# Altium PCB EST_MainV20.PcbDoc (part 1 of 7)
Units mil, origin at the board's own origin, x right, y up, seen from the top; angles counter-clockwise.
Board outline 2745 x 4540 mil, 2 copper layers (Top Layer, Bottom Layer); 326 components, 241 nets, 1052 pads, 399 vias.
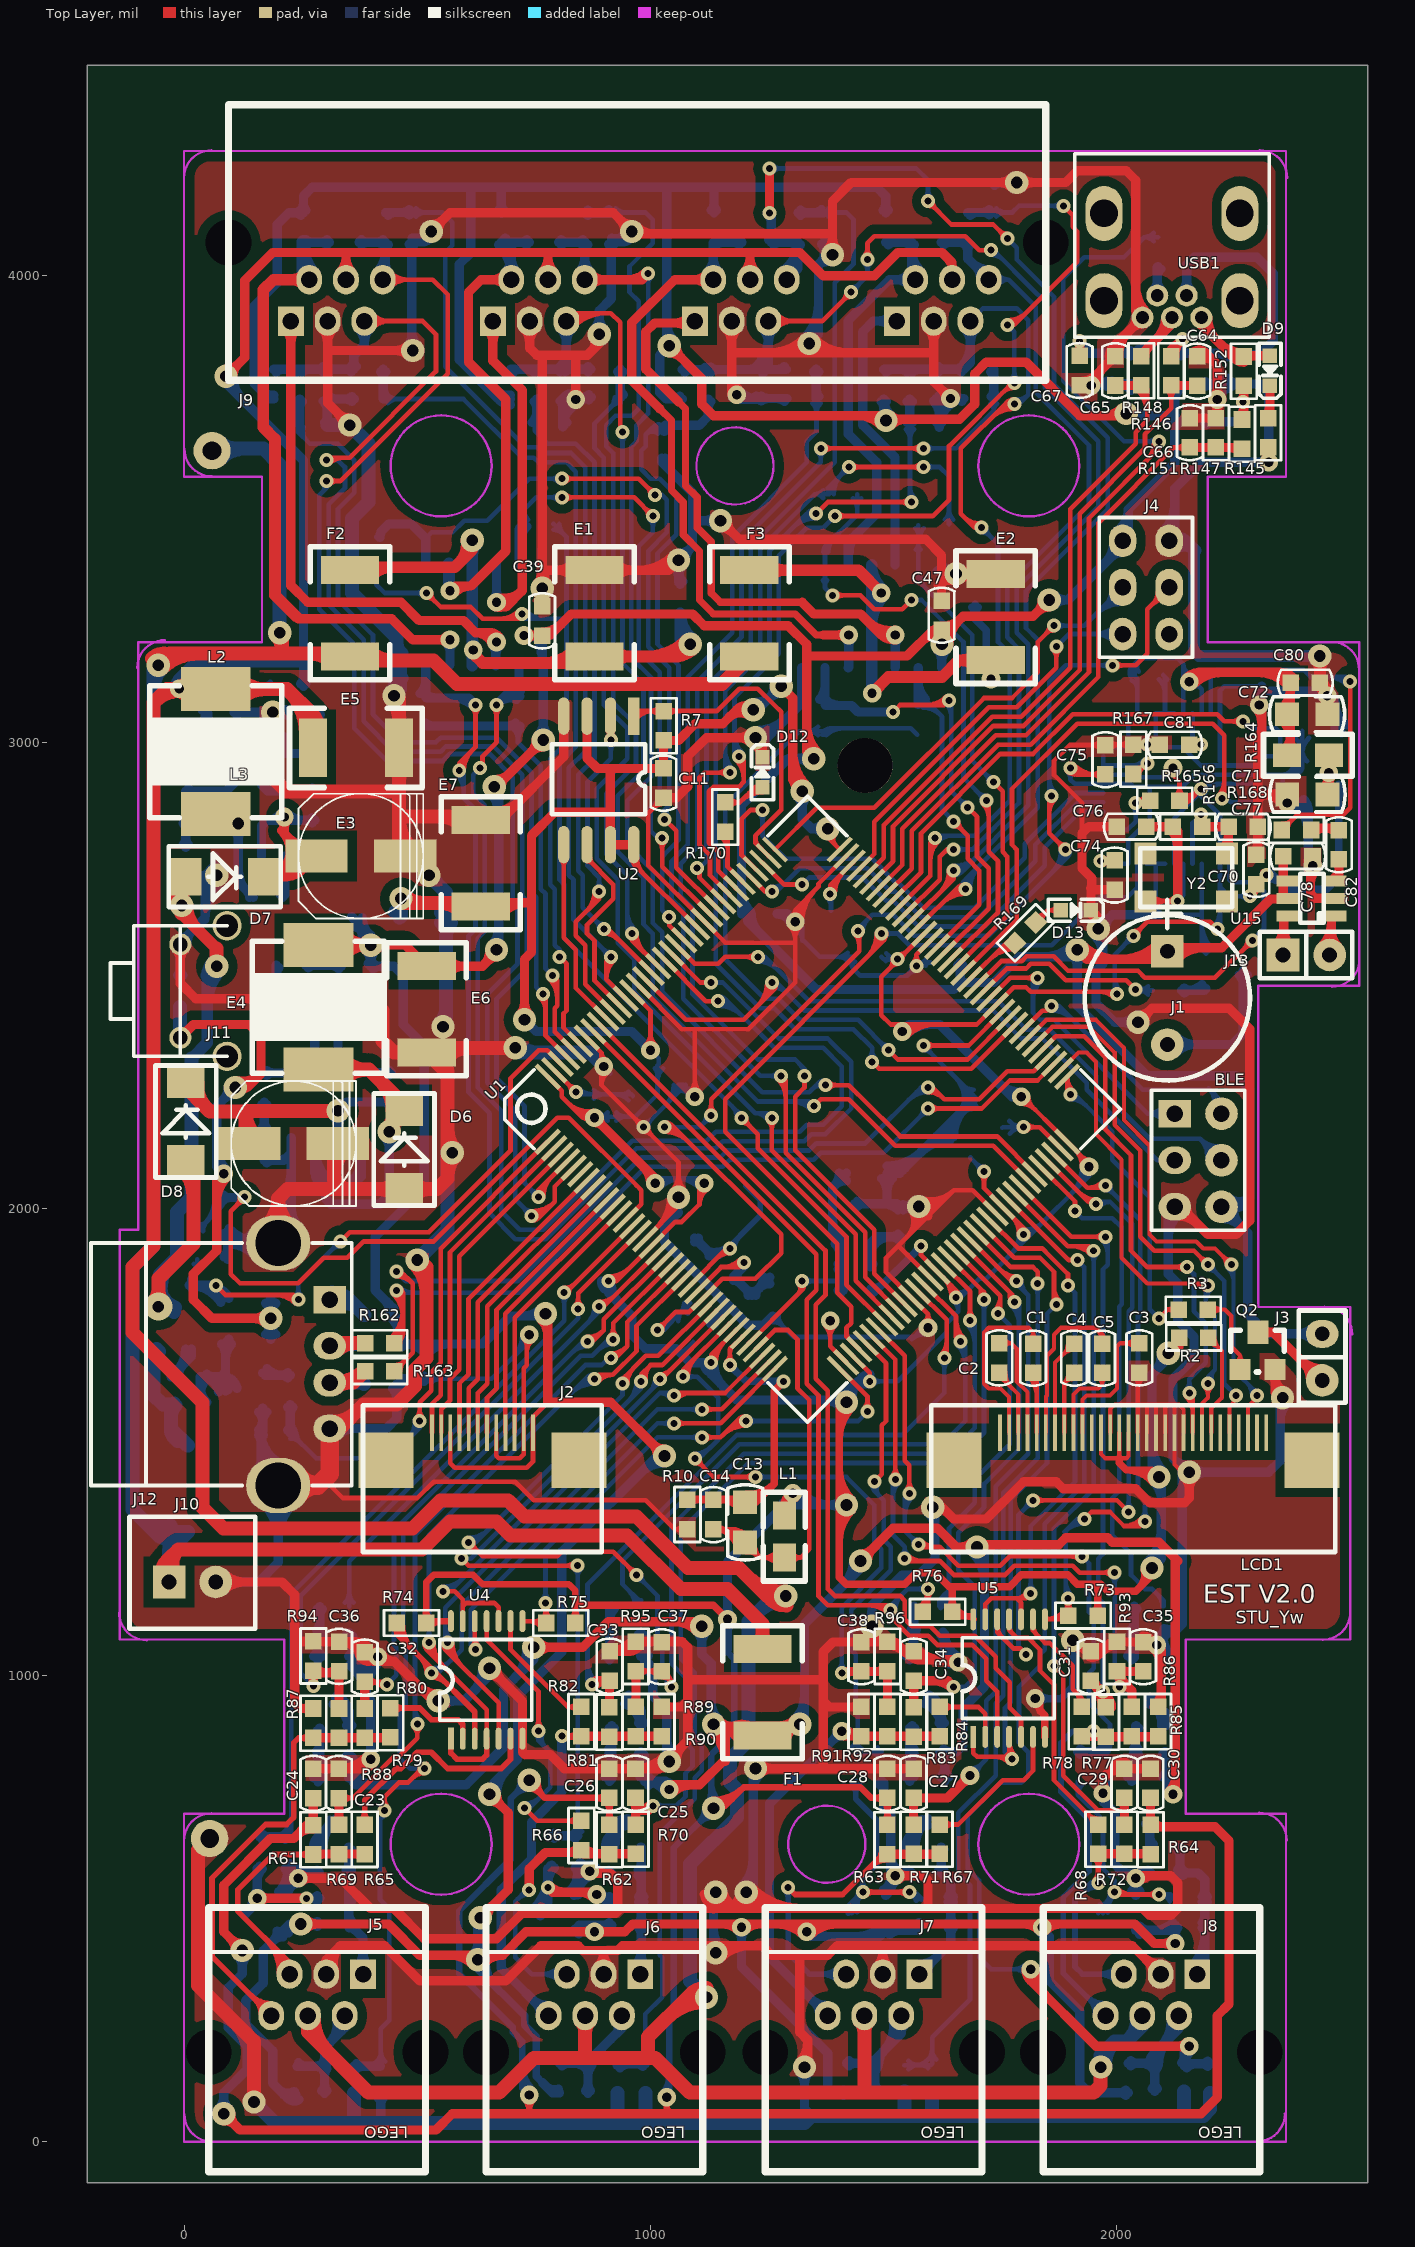
[diagram p0: Top Layer view]
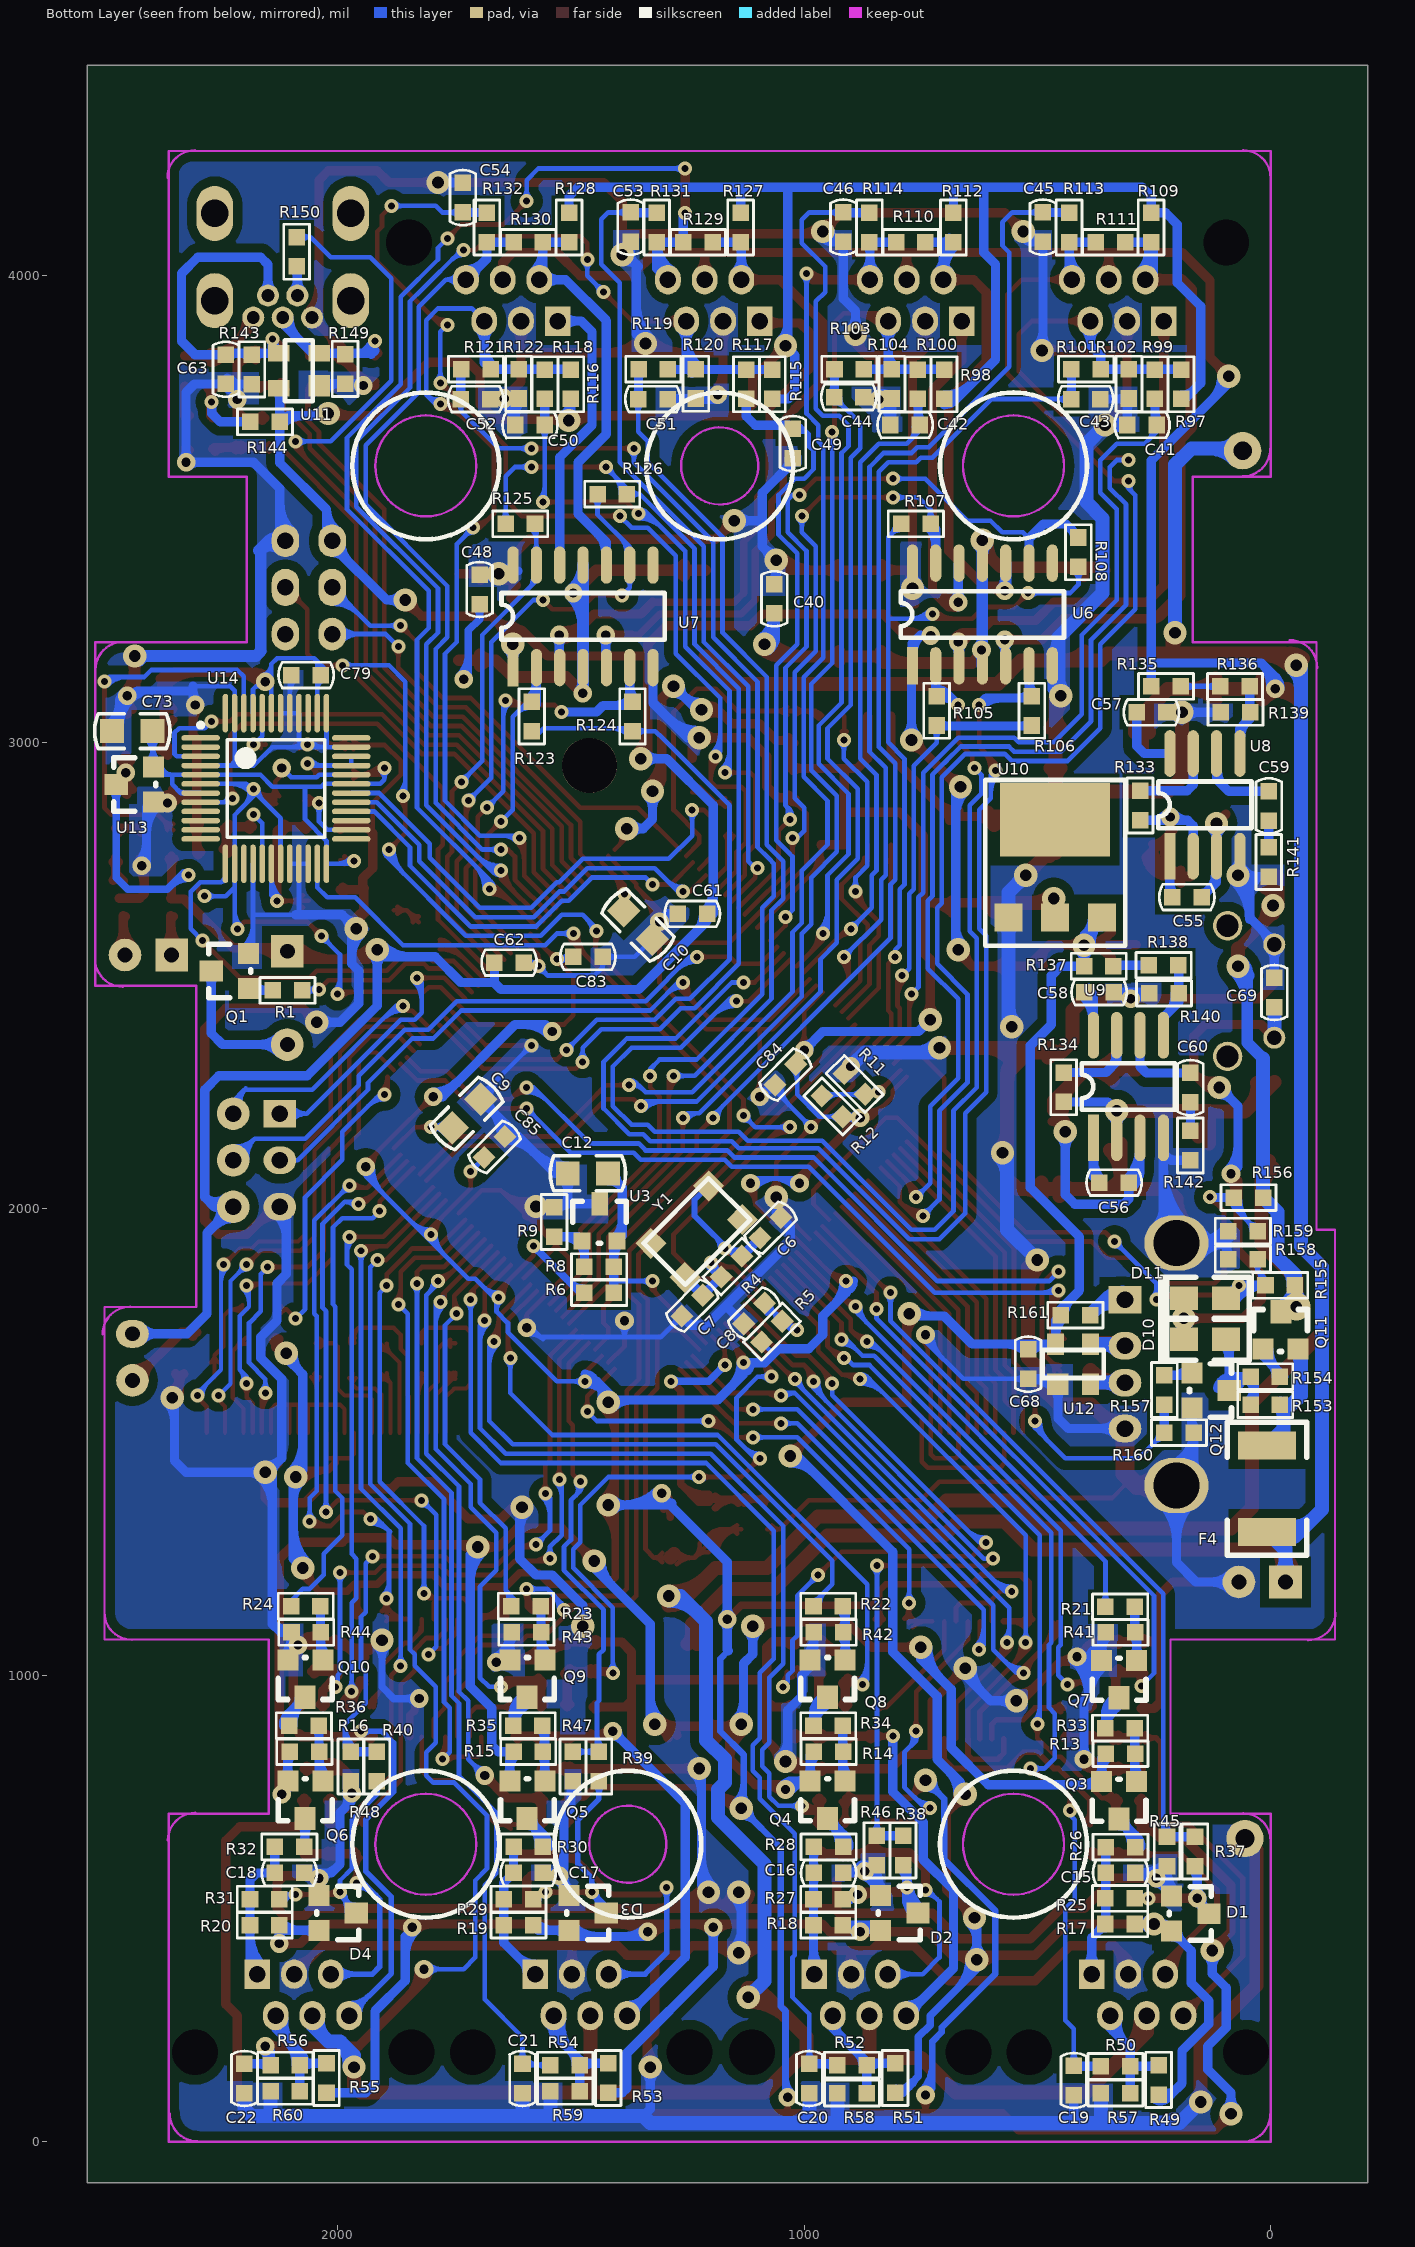
[diagram p1: Bottom Layer view, seen from below]

## Layer stack, top to bottom
Top Layer: signal copper 1.4
Dielectric: prepreg 12.6, FR-4, Dk 4.8
Bottom Layer: signal copper 1.4

## Board outline
-207.8,4451.72 2537.2,4451.72 2537.2,-88.28 -207.8,-88.28

## Design rules (kind name [scope] priority, off if disabled: settings)
Clearance Clearance_1 [All] p1 off: gap=20
Clearance [All] p2: gap=6
ComponentClearance [All] p1 off: gap=10 collisioncheckmode=3 verticalgap=10 showdistances=FALSE
HoleSize [All] p1: absolutevalues=TRUE maxlimit=150 minlimit=1 maxpercent=80.000 minpercent=20.000
HoleToHoleClearance [All] p1 off: gap=10 allowstackedmicrovias=TRUE
MinimumSolderMaskSliver [All] p1 off: minsoldermaskwidth=10
PlaneConnect [All] p1: planeconnectstyle=Direct reliefexpansion=20 reliefentries=4 reliefconductorwidth=10 reliefairgap=10
PolygonConnect [All] p1: connectstyle=Direct reliefconductorwidth=10 reliefentries=4 polygonreliefangle="90 Angle"
RoutingVias [All] p1: holewidth=11.81 width=16.54 viastyle="Through Hole" minholewidth=11.81 minwidth=16.54 maxholewidth=60 maxwidth=150
SilkToSilkClearance [All] p1 off: silktosilkclearance=10
SilkscreenOverComponentPads [All] p1: minsilkscreentomaskgap=10
SolderMaskExpansion [All] p1: expansion=4
TestPointUsage [All] p1: valid=0 allowmultiple=FALSE
Testpoint [All] p1: side=15 testpointundercomponent=TRUE minsize=40 maxsize=100 preferedsize=60 minholesize=0 maxholesize=40 preferedholesize=32 testpointgrid=1 style=1023 order=0123456789
Width [All] p1: maxlimit=100 minlimit=7.87 preferedwidth=7.87 toplayer_prefwidth=19.68 minimp=50.000000 maximp=50.000000 favimp=50.000000
17 further rules are at their usual default settings.

## Classes and differential pairs
component class Designator4: C55 C56 C57 C58 C59 C60 C61 C62 C63 C64 C65 C66 C67 C68 C69 D6 D7 D8 D9 D10 D11 E3 E4 E5 E6 E7 F4 J10 J11 J12 L2 L3 Q11 Q12 R133 R134 R135 R136 R137 R138 R139 R140 R141 R142 R143 R144 R145 R146 R147 R148 R149 R150 R151 R152 R153 R154 R155 R156 R157 R158 R159 R160 R161 R162 R163 U8 U9 U10 U11 U12 USB1
component class EST_MainV20: BLE C1 C2 C3 C4 C5 C6 C7 C8 C9 C10 C11 C12 C13 C14 C83 C84 C85 D12 D13 J1 J2 J3 J4 L1 LCD1 Q1 Q2 R1 R2 R3 R4 R5 R6 R7 R8 R9 R10 R11 R12 R169 R170 U1 U2 U3 Y1
component class Designator3: C70 C71 C72 C73 C74 C75 C76 C77 C78 C79 C80 C81 C82 J13 R164 R165 R166 R167 R168 U13 U14 U15 Y2
component class Designator2: C39 C40 C41 C42 C43 C44 C45 C46 C47 C48 C49 C50 C51 C52 C53 C54 E1 E2 F2 F3 J9 R97 R98 R99 R100 R101 R102 R103 R104 R105 R106 R107 R108 R109 R110 R111 R112 R113 R114 R115 R116 R117 R118 R119 R120 R121 R122 R123 R124 R125 R126 R127 R128 R129 R130 R131 R132 U6 U7
component class Designator1: C15 C16 C17 C18 C19 C20 C21 C22 C23 C24 C25 C26 C27 C28 C29 C30 C31 C32 C33 C34 C35 C36 C37 C38 D1 D2 D3 D4 F1 J5 J6 J7 J8 Q3 Q4 Q5 Q6 Q7 Q8 Q9 Q10 R13 R14 R15 R16 R17 R18 R19 R20 R21 R22 R23 R24 R25 R26 R27 R28 R29 R30 R31 R32 R33 R34 R35 R36 R37 R38 R39 R40 R41 R42 R43 R44 R45 R46 R47 R48 R49 R50 R51 R52 R53 R54 R55 R56 R57 R58 R59 R60 R61 R62 R63 R64 R65 R66 R67 R68 R69 R70 R71 R72 R73 R74 R75 R76 R77 R78 R79 R80 R81 R82 R83 R84 R85 R86 R87 R88 R89 R90 R91 R92 R93 R94 R95 R96 U4 U5

## Components (designator, comment, footprint, x,y, rotation, side; value= is the part's Value field where it differs from the comment)
BLE "CON6" HDR2X3#1 2124,2204 r270 top
C1 "105" CAP_0603 1820,1680 r270 top
C2 "105" CAP_0603 1748,1680 r90 top
C3 "105" CAP_0603 1968,1680 r270 top
C4 "105" CAP_0603 1908,1680 r270 top
C5 "105" CAP_0603 2048,1680 r90 top
C6 "20pF" CAP_0603 1072,1960 r315 bottom
C7 "20pF" CAP_0603 1240,1792 r135 bottom
C8 "104" CAP_0603 1107.26,1775.33 r135 bottom
C9 "20pF" CAP_0805 1724,2204 r135 bottom
C10 "20pF" CAP_0805 1356,2608 r45 bottom
C11 "104" CAP_0603 1028,2912 r90 top
C12 "20pF" CAP_0805 1464,2076 r180 bottom
C13 "20pF" CAP_0805 1203,1328 r270 top
C14 "104" CAP_0603 1135,1344 r90 top
C15 "330pF" CAP_0603 322.2,576.72 r180 bottom
C16 "330pF" CAP_0603 948,576 r180 bottom
C17 "330pF" CAP_0603 1592,576 r180 bottom
C18 "330pF" CAP_0603 2104,576 r180 bottom
C19 "CAP" CAP_0603 422.2,131.72 r270 bottom
C20 "CAP" CAP_0603 989,136 r270 bottom
C21 "CAP" CAP_0603 1604,136 r270 bottom
C22 "CAP" CAP_0603 2200,136 r270 bottom
C23 "10pF" CAP_0603 332.19,767.72 r90 top
C24 "104" CAP_0603 277.19,767.72 r90 top
C25 "10pF" CAP_0603 968,768 r90 top
C26 "104" CAP_0603 912,768 r90 top
C27 "10pF" CAP_0603 1564,768 r90 top
C28 "104" CAP_0603 1508,768 r90 top
C29 "10pF" CAP_0603 2016,768 r90 top
C30 "104" CAP_0603 2072,768 r90 top
C31 "10pF" CAP_0603 1944,1020 r270 top
C32 "10pF" CAP_0603 387.19,1017.72 r270 top
C33 "10pF" CAP_0603 912,1020 r270 top
C34 "10pF" CAP_0603 1564,1020 r270 top
C35 "10pF" CAP_0603 2056,1040 r270 top
C36 "10pF" CAP_0603 332.2,1040.72 r270 top
C37 "10pF" CAP_0603 1024,1040 r270 top
C38 "10pF" CAP_0603 1452,1040 r270 top
C39 "CAP" CAP_0603 768,3260 r90 top
C40 "CAP" CAP_0603 1064,3308 r270 bottom
C41 "100pF" CAP_0603 276,3680 r180 bottom
C42 "CAP" CAP_0603 784,3680 r180 bottom
C43 "47pF" CAP_0603 396,3736 r0 bottom
C44 "CAP" CAP_0603 904,3740 r0 bottom
C45 "100pF" CAP_0603 488,4104 r90 bottom
C46 "CAP" CAP_0603 916,4104 r90 bottom
C47 "CAP" CAP_0603 1624,3272 r90 top
C48 "CAP" CAP_0603 1696,3328 r270 bottom
C49 "100pF" CAP_0603 1024,3640 r90 bottom
C50 "CAP" CAP_0603 1588,3680 r180 bottom
C51 "47pF" CAP_0603 1324,3736 r0 bottom
C52 "CAP" CAP_0603 1704,3736 r0 bottom
C53 "100pF" CAP_0603 1372,4104 r90 bottom
C54 "CAP" CAP_0603 1732,4168 r270 bottom
C55 "104" CAP_0603 180,2668 r180 bottom
C56 "104" CAP_0603 336,2056 r180 bottom
C57 "471" CAP_0603 256,3064 r180 bottom
C58 "471" CAP_0603 368,2464 r180 bottom
C59 "3.9nF" CAP_0603 4,2864 r270 bottom
C60 "3.9nF" CAP_0603 172,2260 r270 bottom
C61 "104" CAP_0603 1240,2632 r180 bottom
C62 "104" CAP_0603 1632,2528 r0 bottom
C63 "15P" CAP_0603 2240,3800 r270 bottom
C64 "15P" CAP_0603 2172,3796 r270 top
C65 "15P" CAP_0603 1996,3796 r90 top
C66 "104" CAP_0603 2156,3664 r270 top
C67 "15P" CAP_0603 1920,3796.73 r90 top
C68 "10uF" CAP_0603 520,1667.27 r270 bottom
C69 "104" CAP_0603 -8,2464 r270 bottom
C70 "104" CAP_0603 2299,2727 r90 top
C71 "10uF" CAP_0805 2408,2888 r0 top
C72 "10uF" CAP_0805 2408,3060 r180 top
C73 "10uF" CAP_0805 2440,3024 r0 bottom
C74 "104" CAP_0603 1995,2715 r90 top
C75 "104" CAP_0603 1975,2963 r270 top
C76 "20pF" CAP_0603 2031,2819 r0 top
C77 "20pF" CAP_0603 2271,2819 r180 top
C78 "104" CAP_0603 2388,2756 r180 top
C79 "104" CAP_0603 2068,3144 r180 bottom
C80 "104" CAP_0603 2404,3128 r180 top
C81 "105" CAP_0603 2123,2995 r0 top
C82 "104" CAP_0603 2476,2780 r90 top
C83 "104" CAP_0603 1464,2540 r180 bottom
C84 "104" CAP_0603 1040,2288 r315 bottom
C85 "104" CAP_0603 1664,2132 r135 bottom
D1 "BAT54S" BAT54S 132.2,546.72 r270 bottom
D2 "BAT54S" BAT54S 756,548 r270 bottom
D3 "BAT54S" BAT54S 1424,548 r270 bottom
D4 "BAT54S" BAT54S 1960,548 r270 bottom
D6 "1N5819" 1N4007SMD 472,2052 r90 top
D7 "1N4007" 1N4007SMD 12,2712 r0 top
D8 "1N4007" 1N4007SMD 4,2112 r90 top
D9 "LED" LED-0603 2328,3796 r270 top
D10 "1N4007" LED-0805 96,1720 r0 bottom
D11 "1N4007" LED-0805 96,1808 r0 bottom
D12 "LED" LED-0603 1240,2936 r90 top
D13 "LED" LED-0603 1912,2640 r0 top
E1 "CAP" 1812 880,3184 r90 top
E2 "CAP" 1812 1740,3176 r90 top
E3 "220uF" KLF_CD0.254 284,2756 r0 top
E4 "220uF" KLF_CD0.254 140,2140 r0 top
E5 "220uF" 1812 276,2988 r0 top
E6 "220uF" 1812 520,2520 r270 top
E7 "220uF" 1812 636,2648 r90 top
F1 "FUSE" 1812 1240,1056 r270 top
F2 "FUSE" 1812 356,3184 r90 top
F3 "FUSE" 1812 1212,3184 r90 top
F4 "FUSE" 1812 8,1492 r270 bottom
J1 "CON2" BUZZER200 2108,2452 r270 top
J2 "KEY_CON" FPC0.5-12 748,1520 r0 top
J3 "CON2" SIP2#1 2440,1732 r0 top
J4 "Header 3X2" HDR2X3#2 2012,3432 r270 top
J5 "CON6" Lego_RJ11 285.27,206.72 r180 top locked (schematic designator PSA1)
J6 "CON6" Lego_RJ11 879.76,206.72 r180 top locked (schematic designator PSB1)
J7 "CON6" Lego_RJ11 1478.19,206.72 r180 top locked (schematic designator PSC1)
J8 "CON6" Lego_RJ11 2073.86,206.72 r180 top locked (schematic designator PSD1)
J9 "CON24" RJ11-4 732.2,4106.72 r0 top locked (schematic designator PMotor)
J10 "CON2" SIP2CON -32,1200 r0 top
J11 "CON2" ButtomSM -7.8,2466.72 r90 top locked (schematic designator S1)
J12 "CON6" USB-A 312.2,1666.72 r270 top locked (schematic designator J1)
J13 "CON2" SIP2#2 2356,2544 r90 top
L1 "10UH" 0805 1287,1252 r90 top
L2 "220uH" L_7x7 68,2980 r90 top
L3 "10uH" L_7x7 288,2432 r90 top
LCD1 "UC1638-180*128" FPC0.5-30 2320,1520 r0 top
Q1 "SS8050" 8050SMD 2276,2452 r90 bottom
Q2 "SS8050" 8050SMD 2244,1740 r0 top
Q3 "PNP" 8050SMD 267.2,686.72 r0 bottom
Q4 "PNP" 8050SMD 892,688 r0 bottom
Q5 "PNP" 8050SMD 1536,688 r0 bottom
Q6 "PNP" 8050SMD 2012,688 r0 bottom
Q7 "NPN" 8050SMD 267.2,946.72 r0 bottom
Q8 "NPN" 8050SMD 892,948 r0 bottom
Q9 "NPN" 8050SMD 1536,948 r0 bottom
Q10 "NPN" 8050SMD 2012,948 r0 bottom
Q11 "IRF530" 8050SMD 36,1784 r180 bottom
Q12 "NPN" 8050SMD 84,1668 r270 bottom
R1 "1K" RES_0603 2108,2468 r180 bottom
R2 "10K" RES_0603 2164,1724 r0 top
R3 "1K" RES_0603 2164,1784 r180 top
R4 "4.7M" RES_0603 1156,1876 r135 bottom
R5 "10K" RES_0603 1068.77,1736.83 r315 bottom
R6 "1K" RES_0603 1440,1820 r180 bottom
R7 "10K" RES_0603 1028,3036 r270 top
R8 "10K" RES_0603 1440,1876 r180 bottom
R9 "10K" RES_0603 1536,1972 r270 bottom
R10 "10K" RES_0603 1079,1344 r90 top
R11 "10K" RES_0603 892,2268 r225 bottom
R12 "10K" RES_0603 940,2220 r225 bottom
R13 "6.8K" RES_0603 322.2,831.72 r180 bottom
R14 "6.8K" RES_0603 948,836 r180 bottom
R15 "6.8K" RES_0603 1592,836 r180 bottom
R16 "6.8K" RES_0603 2072,836 r180 bottom
R17 "10K" RES_0603 322.2,466.72 r0 bottom
R18 "10K" RES_0603 948,464 r0 bottom
R19 "10K" RES_0603 1612,464 r0 bottom
R20 "10K" RES_0603 2156,464 r0 bottom
R21 "2.2K" RES_0603 322.2,1146.72 r0 bottom
R22 "2.2K" RES_0603 948,1148 r0 bottom
R23 "2.2K" RES_0603 1596,1148 r0 bottom
R24 "2.2K" RES_0603 2068,1148 r0 bottom
R25 "1K" RES_0603 322.2,521.72 r0 bottom
R26 "330" RES_0603 322.2,631.72 r180 bottom
R27 "1K" RES_0603 948,520 r0 bottom
R28 "330" RES_0603 948,632 r180 bottom
R29 "1K" RES_0603 1612,520 r0 bottom
R30 "330" RES_0603 1592,632 r180 bottom
R31 "1K" RES_0603 2156,520 r0 bottom
R32 "330" RES_0603 2104,632 r180 bottom
R33 "6.8K" RES_0603 322.2,886.72 r0 bottom
R34 "6.8K" RES_0603 948,892 r0 bottom
R35 "6.8K" RES_0603 1592,892 r0 bottom
R36 "6.8K" RES_0603 2072,892 r0 bottom
R37 "1K" RES_0603 162.2,621.72 r90 bottom
R38 "1K" RES_0603 788,624 r90 bottom
R39 "1K" RES_0603 1440,804 r90 bottom
R40 "1K" RES_0603 1916,804 r90 bottom
R41 "2.2K" RES_0603 322.2,1091.72 r180 bottom
R42 "2.2K" RES_0603 948,1092 r180 bottom
R43 "2.2K" RES_0603 1596,1092 r180 bottom
R44 "2.2K" RES_0603 2068,1092 r180 bottom
R45 "2K" RES_0603 222.2,621.72 r90 bottom
R46 "2K" RES_0603 844,624 r90 bottom
R47 "2K" RES_0603 1496,804 r90 bottom
R48 "2K" RES_0603 1972,804 r90 bottom
R49 "10K" RES_0603 240,132 r90 bottom
R50 "10K" RES_0603 332.2,161.72 r0 bottom
R51 "10K" RES_0603 805,136 r90 bottom
R52 "10K" RES_0603 897,164 r0 bottom
R53 "10K" RES_0603 1420,136 r90 bottom
R54 "10K" RES_0603 1512,164 r0 bottom
R55 "10K" RES_0603 2024,136 r90 bottom
R56 "10K" RES_0603 2112,164 r0 bottom
R57 "10K" RES_0603 332,104 r0 bottom
R58 "10K" RES_0603 897,104 r0 bottom
R59 "10K" RES_0603 1512,108 r0 bottom
R60 "10K" RES_0603 2112,108 r0 bottom
R61 "100K" RES_0603 277.19,647.72 r270 top
R62 "100K" RES_0603 912,648 r270 top
R63 "100K" RES_0603 1508,648 r270 top
R64 "100K" RES_0603 2072,648 r270 top
R65 "220" RES_0603 387.19,647.72 r90 top
R66 "220" RES_0603 852,656 r90 top
R67 "220" RES_0603 1620,648 r90 top
R68 "220" RES_0603 1960,648 r90 top
R69 "4.7K" RES_0603 332.19,647.72 r90 top
R70 "4.7K" RES_0603 968,648 r90 top
R71 "4.7K" RES_0603 1564,648 r90 top
R72 "4.7K" RES_0603 2016,648 r90 top
R73 "4.7K" RES_0603 1928,1128 r180 top
R74 "4.7K" RES_0603 488,1112 r180 top
R75 "4.7K" RES_0603 808,1112 r180 top
R76 "4.7K" RES_0603 1616,1136 r180 top
R77 "4.7K" RES_0603 1976,900 r270 top
R78 "220" RES_0603 1924,900 r90 top
R79 "4.7K" RES_0603 387.19,897.72 r270 top
R80 "220" RES_0603 442.19,897.72 r90 top
R81 "4.7K" RES_0603 912,900 r270 top
R82 "220" RES_0603 852,900 r90 top
R83 "4.7K" RES_0603 1564,900 r270 top
R84 "220" RES_0603 1620,900 r90 top
R85 "220K" RES_0603 2088,900 r90 top
R86 "4.7K" RES_0603 2032,900 r90 top
R87 "220K" RES_0603 277.2,896.72 r90 top
R88 "4.7K" RES_0603 332.2,896.72 r90 top
R89 "220K" RES_0603 1024,900 r90 top
R90 "4.7K" RES_0603 968,900 r90 top
R91 "220K" RES_0603 1452,900 r90 top
R92 "4.7K" RES_0603 1508,900 r90 top
R93 "4.7K" RES_0603 2000,1040 r90 top
R94 "4.7K" RES_0603 277.2,1040.72 r90 top
R95 "4.7K" RES_0603 968,1040 r90 top
R96 "4.7K" RES_0603 1508,1040 r90 top
R97 "100K" RES_0603 192,3768 r270 bottom
R98 "RES" RES_0603 700,3768 r270 bottom
R99 "4.7K" RES_0603 248,3768 r270 bottom
R100 "RES" RES_0603 756,3768 r270 bottom
R101 "4.7K" RES_0603 396,3800 r180 bottom
R102 "100K" RES_0603 304,3768 r90 bottom
R103 "RES" RES_0603 904,3800 r180 bottom
R104 "RES" RES_0603 812,3768 r90 bottom
R105 "RES" RES_0603 716,3068 r270 bottom
R106 "RES" RES_0603 512,3068 r270 bottom
R107 "RES" RES_0603 760,3468 r0 bottom
R108 "RES" RES_0603 412,3408 r270 bottom
R109 "100K" RES_0603 256,4104 r270 bottom
R110 "RES" RES_0603 680,4104 r270 bottom
R111 "100K" RES_0603 344,4072 r180 bottom
R112 "RES" RES_0603 772,4072 r180 bottom
R113 "4.7K" RES_0603 432,4104 r270 bottom
R114 "RES" RES_0603 860,4104 r270 bottom
R115 "100K" RES_0603 1068,3768 r270 bottom
R116 "RES" RES_0603 1500,3768 r270 bottom
R117 "4.7K" RES_0603 1124,3768 r270 bottom
R118 "RES" RES_0603 1556,3768 r270 bottom
R119 "4.7K" RES_0603 1324,3800 r180 bottom
R120 "100K" RES_0603 1232,3768 r90 bottom
R121 "RES" RES_0603 1704,3800 r180 bottom
R122 "RES" RES_0603 1612,3768 r90 bottom
R123 "RES" RES_0603 1584,3056 r270 bottom
R124 "RES" RES_0603 1368,3056 r270 bottom
R125 "RES" RES_0603 1608,3468 r0 bottom
R126 "RES" RES_0603 1412,3532 r180 bottom
R127 "100K" RES_0603 1136,4104 r270 bottom
R128 "RES" RES_0603 1504,4104 r270 bottom
R129 "100K" RES_0603 1228,4072 r180 bottom
R130 "RES" RES_0603 1592,4072 r180 bottom
R131 "4.7K" RES_0603 1316,4104 r270 bottom
R132 "RES" RES_0603 1680,4104 r270 bottom
R133 "0.33" RES_0603 280,2864 r90 bottom
R134 "0.33" RES_0603 444,2260 r90 bottom
R135 "3K" RES_0603 224,3120 r0 bottom
R136 "3K" RES_0603 76,3120 r0 bottom
R137 "3K" RES_0603 368,2520 r0 bottom
R138 "3K" RES_0603 229,2522 r0 bottom
R139 "1K" RES_0603 76,3064 r180 bottom
R140 "1K" RES_0603 229,2462 r180 bottom
R141 "1K" RES_0603 4,2744 r270 bottom
R142 "1K" RES_0603 172,2136 r270 bottom
R143 "15K" RES_0603 2184,3800 r270 bottom
R144 "NC" RES_0603 2156.16,3687.12 r180 bottom
R145 "1K" RES_0603 2324,3664 r270 top
R146 "22" RES_0603 2116,3796 r90 top
R147 "16K" RES_0603 2268,3660 r90 top
R148 "22" RES_0603 2052,3796 r90 top
R149 "15K" RES_0603 1984,3800 r90 bottom
R150 "RES" RES_0603 2088,4052 r270 bottom
R151 "22K" RES_0603 2212,3664 r270 top
R152 "0" RES_0603 2272,3796 r270 top
R153 "RES" RES_0603 12,1580 r180 bottom
R154 "RES" RES_0603 12,1640 r180 bottom
R155 "RES" RES_0603 -20,1836 r180 bottom
R156 "RES" RES_0603 48,2024 r180 bottom
R157 "RES" RES_0603 228,1612 r270 bottom
R158 "RES" RES_0603 60,1892 r180 bottom
R159 "RES" RES_0603 60,1952 r180 bottom
R160 "RES" RES_0603 196,1520 r0 bottom
R161 "RES" RES_0603 419.01,1772 r180 bottom
R162 "22" RES_0603 420,1712 r180 top
R163 "22" RES_0603 420,1652 r180 top
R164 "10" 0805 2364,2972 r0 top
R165 "100K" RES_0603 2103,2875 r180 top
R166 "4.7M" RES_0603 2151,2819 r0 top
R167 "100K" RES_0603 2035,2963 r90 top
R168 "10" RES_0603 2384,2812 r0 top
R169 "1K" RES_0603 1804,2592 r225 top
R170 "1K" RES_0603 1160,2840 r270 top
U1 "STM32F407ZET6" LQFP144 780,2144 r45 top locked
U2 "W25Q64" SOJ-8 964,3056 r270 top
U3 "TL431" TL431(SOT23) 1496,2016 r180 bottom
U4 "74F125" TSSOP14 572,864 r90 top
U5 "74F125" TSSOP14 1692,868 r90 top
U6 "LB1836M" SO-14 768,3164 r90 bottom
U7 "LB1836M" SO-14 1624,3160 r90 bottom
U8 "MP2307" SO-8 216,2756 r90 bottom
U9 "MP2307" SO-8 380,2152 r90 bottom
U10 "LT1117" LT1117SMD 612,2564 r180 bottom
U11 "PRTR5V0U2X" SOT23-4 2040,3764 r0 bottom
U12 "PRTR5V0U2X" SOT23-4 456,1624 r90 bottom
U13 "XC6206P" 8050SMD 2480,2852 r90 bottom
U14 "VS1053B" LQFP48 2355,3123 r180 bottom
U15 "PAM8301" SOT23-6New 2468,2628 r90 top
USB1 "USB-B(Mini)" USB_MINI_5P_DIP 1972.2,3946.72 r0 top locked (schematic designator J2)
Y1 "8MHz" XTAL_5032 1116,1976 r315 bottom
Y2 "12.28MHz" XTAL_5032 2247,2647 r180 top

## Footprints (in the part's own frame and the unit in brackets; to place one, negate y for a bottom-side part, rotate by r counter-clockwise, add the part's x,y. Pads: shape width x height; smd on the part's side, far side on the other; paste and mask are expansions set on the pad)
1N4007SMD [mil]
  rect 70x80 smd: 1(-10,0) 2(160,0)
  silkscreen extent -45,-65 195,65
0805 [mil]
  rect 60x50 smd: 1(0,-0.06) 2(90,-0.06)
  silkscreen extent -50,-45 140,45
1812 [mil]
  rect 60x125 smd: 1(0,0) 2(185,0)
  silkscreen extent -50,-85 235,85
8050SMD [mil]
  rect 45x45 smd: 1(95,-85) 2(20,-85)
  rect 45x50 smd: 3(58,-5)
  silkscreen extent 0,-90 115,0
BAT54S [mil]
  rect 45x45 smd: 1(20,-80) 3(95,-80)
  rect 45x50 smd: 2(58,0)
  silkscreen extent 0,-85 115,5
ButtomSM [mm]
  round 1.6 hole 1.2: 0(-3.556,-2.54) 0(3.556,-2.54)
  round 1.2 hole 0.8: 1(-2.54,0) 2(2.54,0)
  silkscreen extent -3.56,-2.54 3.56,3.81
BUZZER200 [mil]
  rect 70x70 hole 32: 1(-100,0)
  round 70 hole 32: 2(100,0)
  silkscreen extent -210,-177 177,177
CAP_0603 [mm]
  rect 0.9x0.9 smd: 1(-0.79,0.004) 2(0.81,0.004)
  silkscreen extent -1.49,-0.7 1.51,0.7
CAP_0805 [mm]
  rect 1.3x1.3 smd: 1(-1.091,-0.002) 2(1.109,-0.002)
  silkscreen extent -2.04,-0.95 2.06,0.95
FPC0.5-12 [mm]
  rect 0.203x2 smd: 1(0,0) 2(-0.5,0) 3(-1,0) 4(-1.5,0) 5(-2,0) 6(-2.5,0) 7(-3,0) 8(-3.5,0) 9(-4,0) 10(-4.5,0) 11(-5,0) 12(-5.5,0)
  rect 3x3 smd: 51(2.5,-1.5) 52(-8,-1.5)
  silkscreen extent -9.25,-6.5 3.75,1.5
FPC0.5-30 [mm]
  rect 0.203x2 smd: 1(0,0) 2(-0.5,0) 3(-1,0) 4(-1.5,0) 5(-2,0) 6(-2.5,0) 7(-3,0) 8(-3.5,0) 9(-4,0) 10(-4.5,0) 11(-5,0) 12(-5.5,0) 13(-6,0) 14(-6.5,0) 15(-7,0) 16(-7.5,0) 17(-8,0) 18(-8.5,0) 19(-9,0) 20(-9.5,0) 21(-10,0) 22(-10.5,0) 23(-11,0) 24(-11.5,0) 25(-12,0) 26(-12.5,0) 27(-13,0) 28(-13.5,0) 29(-14,0) 30(-14.5,0)
  rect 3x3 smd: 51(2.5,-1.5) 52(-17,-1.5)
  silkscreen extent -18.25,-6.5 3.75,1.5
HDR2X3#1 [mil]
  rect 59.06x70 hole 35.43: 1(0,0)
  round 70 hole 35.43: 2(0,100) 4(100,100) 6(200,100)
  oval 59.06x70 hole 35.43: 3(100,0) 5(200,0)
  silkscreen extent -50,-50 250,150
HDR2X3#2 [mil]
  oval 70x59.06 hole 35.43: 1(0,0) 2(0,100) 5(200,0) 6(200,100)
  oval 80x59.06 hole 35.43: 3(100,0) 4(100,100)
  silkscreen extent -50,-50 250,150
KLF_CD0.254 [mm]
  rect 3.4x1.8 smd: 1(0,0) 2(4.826,0)
  silkscreen extent -0.99,-3.4 5.81,3.4
L_7x7 [mm]
  rect 2.4x3.8 smd: 1(-3.4,0) 2(3.4,0)
  silkscreen extent -3.6,-3.6 3.6,3.6
LED-0603 [mil]
  rect 31x31 smd: 1(-32.86,-0.1) 2(32.14,-0.1)
  silkscreen extent -59,-24 59,24
LED-0805 [mil]
  rect 60x50 smd: 1(0,0) 2(90,0)
  silkscreen extent -50,-45 140,45
Lego_RJ11 [mm]
  round 2.2 hole 2.5: 0(-5.9,0.381) 0(5.9,0.381)
  rect 1.4x1.6 hole 0.9: 1(-2.5,-3.873)
  oval 1.4x1.6 hole 0.9: 2(-1.5,-1.619) 3(-0.5,-3.873) 4(0.5,-1.619) 5(1.5,-3.873) 6(2.5,-1.619)
  silkscreen extent -5.9,-7.5 5.9,6.88
LQFP48 [mm]
  oval 2.1x0.3 smd: 1(1.556,-2.889) 2(1.556,-3.389) 3(1.556,-3.889) 4(1.556,-4.389) 5(1.556,-4.889) 6(1.556,-5.389) 7(1.556,-5.889) 8(1.556,-6.389) 9(1.556,-6.889) 10(1.556,-7.389) 11(1.556,-7.889) 12(1.556,-8.389) 25(9.756,-8.389) 26(9.756,-7.889) 27(9.756,-7.389) 28(9.756,-6.889) 29(9.756,-6.389) 30(9.756,-5.889) 31(9.756,-5.389) 32(9.756,-4.889) 33(9.756,-4.389) 34(9.756,-3.889) 35(9.756,-3.389) 36(9.756,-2.889)
  oval 0.3x2.1 smd: 13(2.906,-9.739) 14(3.406,-9.739) 15(3.906,-9.739) 16(4.406,-9.739) 17(4.906,-9.739) 18(5.406,-9.739) 19(5.906,-9.739) 20(6.406,-9.739) 21(6.906,-9.739) 22(7.406,-9.739) 23(7.906,-9.739) 24(8.406,-9.739) 37(8.406,-1.539) 38(7.906,-1.539) 39(7.406,-1.539) 40(6.906,-1.539) 41(6.406,-1.539) 42(5.906,-1.539) 43(5.406,-1.539) 44(4.906,-1.539) 45(4.406,-1.539) 46(3.906,-1.539) 47(3.406,-1.539) 48(2.906,-1.539)
  silkscreen extent 1.43,-8.29 8.31,-2.06
LQFP144 [mil]
  rect 70.87x10 smd: 1(-0.35,0.02) 2(-0.35,-19.66) 3(-0.35,-39.35) 4(-0.35,-59.03) 5(-0.35,-78.72) 6(-0.35,-98.4) 7(-0.35,-118.09) 8(-0.35,-137.77) 9(-0.35,-157.46) 10(-0.35,-177.14) 11(-0.35,-196.83) 12(-0.35,-216.51) 13(-0.35,-236.2) 14(-0.35,-255.88) 15(-0.35,-275.57) 16(-0.35,-295.25) 17(-0.35,-314.94) 18(-0.35,-334.62) 19(-0.35,-354.31) 20(-0.35,-373.99) 21(-0.35,-393.68) 22(-0.35,-413.36) 23(-0.35,-433.05) 24(-0.35,-452.73) 25(-0.35,-472.42) 26(-0.35,-492.1) 27(-0.35,-511.79) 28(-0.35,-531.47) 29(-0.35,-551.16) 30(-0.35,-570.84) 31(-0.35,-590.53) 32(-0.35,-610.21) 33(-0.35,-629.9) 34(-0.35,-649.58) 35(-0.35,-669.27) 36(-0.35,-688.95) 73(885.47,-688.95) 74(885.47,-669.27) 75(885.47,-649.58) 76(885.47,-629.9) 77(885.47,-610.21) 78(885.47,-590.53) 79(885.47,-570.84) 80(885.47,-551.16) 81(885.47,-531.47) 82(885.47,-511.79) 83(885.47,-492.1) 84(885.47,-472.42) 85(885.47,-452.73) 86(885.47,-433.05) 87(885.47,-413.36) 88(885.47,-393.68) 89(885.47,-373.99) 90(885.47,-354.31) 91(885.47,-334.62) 92(885.47,-314.94) 93(885.47,-295.25) 94(885.47,-275.57) 95(885.47,-255.88) 96(885.47,-236.2) 97(885.47,-216.51) 98(885.47,-196.83) 99(885.47,-177.14) 100(885.47,-157.46) 101(885.47,-137.77) 102(885.47,-118.09) 103(885.47,-98.4) 104(885.47,-78.72) 105(885.47,-59.03) 106(885.47,-39.35) 107(885.47,-19.66) 108(885.47,0.02)
  rect 10x70.87 smd: 37(98.07,-787.38) 38(117.76,-787.38) 39(137.44,-787.38) 40(157.13,-787.38) 41(176.81,-787.38) 42(196.5,-787.38) 43(216.18,-787.38) 44(235.87,-787.38) 45(255.55,-787.38) 46(275.24,-787.38) 47(294.92,-787.38) 48(314.61,-787.38) 49(334.29,-787.38) 50(353.98,-787.38) 51(373.66,-787.38) 52(393.35,-787.38) 53(413.03,-787.38) 54(432.72,-787.38) 55(452.4,-787.38) 56(472.09,-787.38) 57(491.77,-787.38) 58(511.46,-787.38) 59(531.14,-787.38) 60(550.83,-787.38) 61(570.51,-787.38) 62(590.2,-787.38) 63(609.88,-787.38) 64(629.57,-787.38) 65(649.25,-787.38) 66(668.94,-787.38) 67(688.62,-787.38) 68(708.31,-787.38) 69(727.99,-787.38) 70(747.68,-787.38) 71(767.36,-787.38) 72(787.05,-787.38) 109(787.05,98.45) 110(767.36,98.45) 111(747.68,98.45) 112(727.99,98.45) 113(708.31,98.45) 114(688.62,98.45) 115(668.94,98.45) 116(649.25,98.45) 117(629.57,98.45) 118(609.88,98.45) 119(590.2,98.45) 120(570.51,98.45) 121(550.83,98.45) 122(531.14,98.45) 123(511.46,98.45) 124(491.77,98.45) 125(472.09,98.45) 126(452.4,98.45) 127(432.72,98.45) 128(413.03,98.45) 129(393.35,98.45) 130(373.66,98.45) 131(353.98,98.45) 132(334.29,98.45) 133(314.61,98.45) 134(294.92,98.45) 135(275.24,98.45) 136(255.55,98.45) 137(235.87,98.45) 138(216.18,98.45) 139(196.5,98.45) 140(176.81,98.45) 141(157.13,98.45) 142(137.44,98.45) 143(117.76,98.45) 144(98.07,98.45)
  silkscreen extent -32,-819 917,130
LT1117SMD [mil]
  rect 60x60 smd: 1(50,60) 2(150,60) 3(250,60)
  rect 236.22x157.48 smd: 4(150,270)
  silkscreen extent 0,0 300,355
RES_0603 [mm]
  rect 0.9x0.9 smd: 1(-0.787,0) 2(0.813,0)
  silkscreen extent -1.49,-0.7 1.51,0.7
RJ11-4 [mm]
  round 2.2 hole 2.5: 0(-16.179,-0.9) 0(28.321,-0.9)
  rect 1.4x1.6 hole 0.9: 1(-12.779,-5.175) 7(-1.779,-5.175) 13(9.221,-5.175) 19(20.221,-5.175)
  oval 1.4x1.6 hole 0.9: 2(-11.779,-2.921) 3(-10.779,-5.175) 4(-9.779,-2.921) 5(-8.779,-5.175) 6(-7.779,-2.921) 8(-0.779,-2.921) 9(0.221,-5.175) 10(1.221,-2.921) 11(2.221,-5.175) 12(3.221,-2.921) 14(10.221,-2.921) 15(11.221,-5.175) 16(12.221,-2.921) 17(13.221,-5.175) 18(14.221,-2.921) 20(21.221,-2.921) 21(22.221,-5.175) 22(23.221,-2.921) 23(24.221,-5.175) 24(25.221,-2.921)
  silkscreen extent -16.18,-8.4 28.32,6.6
SIP2#1 [mil]
  oval 70x60 hole 32: 1(0,0)
  round 70 hole 32: 2(0,-100)
  silkscreen extent -50,-148 50,50
SIP2#2 [mil]
  rect 70x70 hole 32: 1(0,0)
  round 70 hole 32: 2(0,-100)
  silkscreen extent -50,-148 50,50
SIP2CON [mil]
  rect 70x70 hole 32: 1(0,0)
  round 70 hole 32: 2(100,0)
  silkscreen extent -85,-100 185,140
SO-8 [mil]
  rect 100x24 smd: 1(0,0)
  oval 100x24 smd: 2(0,-50) 3(0,-100) 4(0,-150) 5(220,-150) 6(220,-100) 7(220,-50) 8(220,0)
  silkscreen extent 60,-175 160,25
SO-14 [mil]
  rect 80x24 smd: 1(0,0)
  oval 80x24 smd: 2(0,-50) 3(0,-100) 4(0,-150) 5(0,-200) 6(0,-250) 7(0,-300) 8(220,-300) 9(220,-250) 10(220,-200) 11(220,-150) 12(220,-100) 13(220,-50) 14(220,0)
  silkscreen extent 60,-325 160,25
SOJ-8 [mil]
  rect 80x24 smd: 1(0,0)
  oval 80x24 smd: 2(0,-50) 3(0,-100) 4(0,-150) 5(275.59,-150) 6(275.59,-100) 7(275.59,-50) 8(275.59,0)
  silkscreen extent 60,-175 210,25
SOT23-4 [mil]
  rect 46x46 smd: 1(0,0)
  rect 46x36 smd: 2(0,-70) 3(86,-70) 4(86,5)
  silkscreen extent 13,-98 73,33
SOT23-6New [mm]
  rect 0.6x1.2 smd: 1(0,0) 2(0.95,0) 3(1.9,0) 4(1.9,2.6) 5(0.95,2.6) 6(0,2.6)
  silkscreen extent -0.38,0.64 2.29,1.91
TL431(SOT23) [mil]
  rect 36x36 smd: 1(20,-85) 3(95,-85)
  rect 36x50 smd: 2(58,-5)
  silkscreen extent 0,-90 115,0
TSSOP14 [mm]
  rect 1.2x0.32 smd: 1(0,0)
  oval 1.2x0.32 smd: 2(0,-0.65) 3(0,-1.3) 4(0,-1.95) 5(0,-2.6) 6(0,-3.25) 7(0,-3.9) 8(6.4,-3.9) 9(6.4,-3.25) 10(6.4,-2.6) 11(6.4,-1.95) 12(6.4,-1.3) 13(6.4,-0.65) 14(6.4,0)
  silkscreen extent 1,-4.4 5.4,0.6
USB-A [mm]
  rect 1.5x1.778 hole 0.9: 1(-3.5,0)
  oval 1.5x1.778 hole 0.9: 2(-1,0) 3(1,0) 4(3.5,0)
  oval 3x3.5 hole 2.5: 5(-6.6,-2.8) 6(6.6,-2.8)
  silkscreen extent -6.6,-13 6.6,1.2
USB_MINI_5P_DIP [mm]
  round 1.2 hole 0.7: 1(5.3,-0.92) 2(4.5,0.28) 3(3.7,-0.92) 4(2.9,0.28) 5(2.1,-0.92)
  oval 2x3 hole 1.5: ""(0,0) ""(0,4.75) ""(7.4,0) ""(7.4,4.75)
  silkscreen extent -1.6,-2 9,8
XTAL_5032 [mm]
  rect 1.2x1.2 smd: 1(0.279,-2.91) 2(4.721,-0.305) 3(4.721,-2.91) 4(0.279,-0.305)
  silkscreen extent 0,-3.2 5,0

## Part data
C1 C2 C3 C4 C5 C6 C7 C8 C9 C10 C11 C12 C13 C14 C15 C16 C17 C18 C23 C24 C25 C26 C27 C28 C29 C30 C31 C32 C33 C34 C35 C36 C37 C38 C41 C43 C45 C49 C51 C53 C55 C56 C57 C58 C59 C60 C61 C62 C63 C64 C65 C66 C67 C68 C69 C70 C71 C72 C73 C74 C75 C76 C77 C78 C79 C80 C81 C82 C83 C84 C85: library part CAP, "Capacitor"
C19 C20 C21 C22 C39 C40 C42 C44 C46 C47 C48 C50 C52 C54: "Capacitor"
D1 D2 D3 D4: library part BANQIAO-A, "DIODE BRIDGE"
D6 D7 D8 D10 D11: library part DIODE, "DIODE"
E1 E2 E3 E4 E5 E6 E7: library part CAP2, "Bi-Polar Capacitor"
F1 F2 F3 F4: "Fuse"
J1 J3 J10 J13: "SOCKET"
J2: library part CON12, "SOCKET"
J4: "Header, 3-Pin, Dual row"
J5 J6 J7 J8: library part LEGO_RJ11_IN, "LEGO_RJ11_IN"
J9: library part RJ11-4
J11: library part Buttom, "Buttom"
J12: library part USB_A, "USB_A"
L1 L2 L3: library part INDUCTOR, "Inductor"
LCD1: library part UC1638
Q1 Q2: library part NPN, "triode"
Q3 Q4 Q5 Q6 Q7 Q8 Q9 Q10 Q12: "triode"
Q11: "N-Channel MOSFET"
R1 R2 R3 R4 R5 R6 R7 R8 R9 R10 R11 R12 R13 R14 R15 R16 R17 R18 R19 R20 R21 R22 R23 R24 R25 R26 R27 R28 R29 R30 R31 R32 R33 R34 R35 R36 R37 R38 R39 R40 R41 R42 R43 R44 R45 R46 R47 R48 R49 R50 R51 R52 R53 R54 R55 R56 R57 R58 R59 R60 R61 R62 R63 R64 R65 R66 R67 R68 R69 R70 R71 R72 R73 R74 R75 R76 R77 R78 R79 R80 R81 R82 R83 R84 R85 R86 R87 R88 R89 R90 R91 R92 R93 R94 R95 R96 R97 R99 R101 R102 R109 R111 R113 R115 R117 R119 R120 R127 R129 R131 R133 R134 R135 R136 R137 R138 R139 R140 R141 R142 R143 R144 R145 R146 R147 R148 R149 R151 R152 R162 R163 R164 R165 R166 R167 R168 R169 R170: library part RES, "Resistor"
R98 R100 R103 R104 R105 R106 R107 R108 R110 R112 R114 R116 R118 R121 R122 R123 R124 R125 R126 R128 R130 R132 R150 R153 R154 R155 R156 R157 R158 R159 R160 R161: "Resistor"
U2: library part 25P16
U3: "Adjustable Precision Shunt Regulator"
U4 U5: "Quad Bus Buffer Gate with 3-State Output"
U6 U7: library part LM1836
U14: library part VS1053
USB1: library part USB_MICRO_B, "USB_MICRO_B"
Y1 Y2: library part XTAL, "CRYSTAL"

## Free pads (board coordinates)
  round 80 hole 40: 0(60,3625) 1(55,650)
  round 118.11 hole 118.11: 0(1460,2950)

## Via types
v1: diameter 30, hole 15, Top Layer to Bottom Layer, 237 vias
v2: diameter 50, hole 25, Top Layer to Bottom Layer, 93 vias
v3: diameter 40, hole 20, Top Layer to Bottom Layer, 68 vias
v4: diameter 60, hole 25, Top Layer to Bottom Layer, 1 vias

## Nets (pads, with @x,y where several pads share a name; then routed paths per layer and width w, separated by ;. In a path a pad name is that pad's centre, name@x,y a point inside that pad or via, vN(x,y) a via of type N, cw(c..) or ccw(c..) an arc to the next point about the centre after c; other vN are vias at no path point)
1OUTA1: J9.1 U6.3 | length 1301.1
  Top Layer w20: J9.1@216.68,3886.63 cw(c186.7,3856.65) 229.09,3856.65 cw(c271.49,3856.65) J9.1@241.51,3886.63 ; J9.1@229.09,3902.98 229.09,3335.91 265,3300 465,3300 503.94,3261.06 598.94,3261.06 625,3235 ; 655,3235 cw(c655,3208.75) v3@679.23,3218.85 ; v3@660.77,3211.15 ccw(c625,3196.25) 625,3235 ; v3(670,3215) 650,3235 625,3235
  Bottom Layer w20: U6.3@668,3164 668,3213 v3(670,3215) ccw(c681.1,3203.9) U6.3@669.48,3193.34 ; U6.3@668,3186.03 cw(c698.97,3186.03) v3@677.07,3207.93
1OUTA2: J9.2 R109.2 R111.2 U6.5 | length 1634.1
  Top Layer w20: 240,3270 245,3265 445,3265 490,3220 v3(570,3220) ; v3@562.93,3212.93 ccw(c545.86,3195.86) 545.86,3220 ccw(c545.86,3244.14) v3@562.93,3227.07
  Top Layer w25: 240,3270 195,3315 195,3650 170,3675 170,3970 191.72,3991.72 J9.2@268.46,3991.72 ; J9.2@257.82,3981.07 ccw(c232.11,3955.36) 232.11,3991.72 ccw(c232.11,4028.08) J9.2@257.82,4002.37
  Bottom Layer w14: U6.5@568,3164 U6.5@570,3166
  Bottom Layer w20: R109.2@256.02,4072.01 R111.2@312.01,4071.98 ; R109.2@261.47,4066.55 cw(c274.59,4053.44) 274.59,4071.98 ; R109.2@261.47,4077.46 ccw(c274.7,4090.7) 274.7,4071.98 ; R111.2@306.55,4066.53 ccw(c293.38,4053.35) 293.38,4071.98 ccw(c293.38,4090.61) R111.2@306.55,4077.44 ; v3@562.93,3212.93 cw(c545.86,3195.86) 570,3195.86 cw(c594.14,3195.86) v3@577.07,3212.93 ; U6.5@570,3166 v3(570,3220)
  Bottom Layer w30: R109.2@256.02,4056.03 ccw(c328.84,4056.03) J9.2@277.34,4004.54 ; R109.2@256.02,4072.01 256.02,4004.17 J9.2@268.46,3991.72
1OUTB1: J9.7 U6.12 | length 964.5
  Top Layer w20: J9.7@649.75,3886.63 cw(c619.77,3856.65) 662.16,3856.65 cw(c704.56,3856.65) J9.7@674.58,3886.63 ; J9.7@662.16,3902.98 662.16,3817.84 725,3755 725,3325 ; v3@667.79,3290.25 ccw(c675.31,3323.42) 699.37,3299.37 ; v3@670,3290 690,3290 725,3325 ; v3@672.21,3309.75 ccw(c684.79,3365.21) 725,3325
  Bottom Layer w14: U6.12@668,3384 U6.12@670,3382
  Bottom Layer w20: v3@662.93,3307.07 ccw(c645.86,3324.14) 670,3324.14 ccw(c694.14,3324.14) v3@677.07,3307.07 ; v3@670,3290 U6.12@670,3382
  other v3: 670,3300
1OUTB2: J9.8 R110.2 R112.2 U6.10 | length 1409.9
  Top Layer w20: v3(570,3325) 580,3335 615,3335 ; v3@577.42,3318.3 cw(c615,3284.38) 615,3335 ; J9.8@689.12,3979.3 ccw(c659.14,3949.33) 659.14,3991.72 ccw(c659.14,4034.11) J9.8@689.12,4004.14 ; J9.8@701.53,3991.72 636.72,3991.72 610,3965 610,3815 690,3735 690,3445 690,3410 615,3335
  Bottom Layer w14: v3@568,3327 v3(570,3325)
  Bottom Layer w20: R110.2@674.56,4066.55 cw(c609.44,4001.43) J9.8@701.53,4001.43 ; R110.2@680.02,4072.01 710,4072.01 ; R110.2@685.47,4066.55 cw(c698.65,4053.38) 698.65,4072.01 cw(c698.65,4090.64) R110.2@685.47,4077.46 ; R110.2@688.7,4080.69 cw(c657.72,4049.71) 701.53,4049.71 ; J9.8@689.12,4008.07 ccw(c659.14,4038.05) 701.53,4038.05 ccw(c743.93,4038.05) J9.8@713.95,4008.07 ; J9.8@701.53,3991.72 701.53,4063.54 710,4072.01 ; 721.32,4072.01 cw(c721.32,4053.3) R112.2@734.55,4066.53 ; 721.44,4072.01 ccw(c721.44,4090.56) R112.2@734.55,4077.44 ; R112.2@740.01,4071.98 710,4072.01
  Bottom Layer w25: v3@568,3327 U6.10@568,3384 ; U6.10@568,3347.94 ccw(c592.94,3347.94) v3@575.3,3330.3
1OUTC1: J9.13 U7.3 | length 1439.7
  Top Layer w16: 1060,3730 1075,3715 1075,3550 1100,3525 1100,3460 1130,3430 1130,3320 1150,3300 1325,3300
  Top Layer w20: 1052.43,3898.87 ccw(c1052.43,3941.85) J9.13@1082.82,3911.46 ; 1053.26,3898.87 cw(c1053.26,3857.06) J9.13@1082.82,3886.63 ; 1060,3730 990,3800 990,3880 1008.87,3898.87 1091.13,3898.87 J9.13@1095.24,3902.98 ; 1325,3300 1350,3275 1450,3275 1495,3230 v3(1525,3230) ; 1465,3260 ccw(c1514.84,3309.83) v3@1523.74,3239.92 ; 1493.83,3231.17 ccw(c1521.35,3258.68) v3@1526.26,3220.08
  Bottom Layer w20: v3@1517.93,3222.93 cw(c1500.86,3205.86) 1525,3205.86 cw(c1549.14,3205.86) v3@1532.07,3222.93 ; U7.3@1524,3160 1525,3161 v3(1525,3230)
1OUTC2: J9.14 R127.2 R129.2 U7.5 | length 1713.9
  Top Layer w16: 1020,3715 1045,3690 1045,3540 1070,3515 1070,3445 1105,3410 1105,3305 1135,3275 1310,3275 1355,3230 1370,3230
  Top Layer w20: 1020,3715 960,3775 960,3900 1051.72,3991.72 J9.14@1134.61,3991.72 ; J9.14@1122.19,3979.3 ccw(c1092.21,3949.33) 1092.21,3991.72 ccw(c1092.21,4034.11) J9.14@1122.19,4004.14 ; 1370,3230 v3(1425,3230) ; v3@1417.93,3222.93 ccw(c1400.86,3205.86) 1400.86,3230 ccw(c1400.86,3254.14) v3@1417.93,3237.07
  Bottom Layer w20: J9.14@1122.19,4008.07 ccw(c1092.21,4038.05) 1134.61,4038.05 ccw(c1177,4038.05) J9.14@1147.02,4008.07 ; J9.14@1134.61,3991.72 R127.2@1134.61,4070.6 ; 1134.61,4049.97 cw(c1158.05,4049.97) 1141.47,4066.55 cw(c1154.65,4053.38) 1154.65,4072.01 cw(c1154.65,4090.64) R127.2@1141.47,4077.46 ; R127.2@1136.02,4072.01 R129.2@1196.01,4071.98 ; 1177.32,4072.01 cw(c1177.32,4053.3) R129.2@1190.55,4066.53 ; 1177.44,4072.01 ccw(c1177.44,4090.56) R129.2@1190.55,4077.44 ; v3@1417.93,3222.93 cw(c1400.86,3205.86) 1425,3205.86 cw(c1449.14,3205.86) v3@1432.07,3222.93 ; U7.5@1424,3160 1425,3161 v3(1425,3230)
1OUTD1: J9.19 U7.12 | length 678
  Bottom Layer w20: J9.19@1515.89,3890.56 ccw(c1485.91,3860.59) 1485.91,3902.98 ccw(c1485.91,3945.37) J9.19@1515.89,3915.4 ; U7.12@1524,3380 1524,3611 1455,3680 1455,3880 1477.98,3902.98 J9.19@1528.31,3902.98
1OUTD2: J9.20 R128.2 R130.2 U7.10 | length 1145.8
  Bottom Layer w20: U7.10@1424,3380 1424,3429 1485,3490 1485,3600 1424,3661 1424,3904 1511.72,3991.72 J9.20@1567.68,3991.72 1560.01,3999.39 R130.2@1560.01,4071.98 ; U7.10@1426,3408 cw(c1481.53,3408) 1442.26,3447.26 ; R128.2@1504.02,4072.01 R130.2@1560.01,4071.98 ; R128.2@1509.47,4066.55 cw(c1522.65,4053.38) 1522.65,4072.01 cw(c1522.65,4090.64) R128.2@1509.47,4077.46 ; 1541.32,4072.01 cw(c1541.32,4053.3) 1554.55,4066.53 cw(c1541.38,4053.35) 1560.01,4053.35 cw(c1578.64,4053.35) R130.2@1565.46,4066.53 ; 1541.44,4072.01 ccw(c1541.44,4090.56) R130.2@1554.55,4077.44 ; J9.20@1555.26,3979.3 ccw(c1525.28,3949.33) 1525.28,3991.72 ccw(c1525.28,4034.11) J9.20@1555.26,4004.14 ; R130.2@1560.01,4056.56 ccw(c1628.58,4056.56) J9.20@1580.09,4008.07
ADC_A0: R37.2 R45.2 U1.14 | length 1882.2
  Top Layer w10: v1(815,1820) 817.87,1820 U1.14@960.69,1962.81 ; v1@815,1830 ccw(c815,1861.07) 836.97,1839.1 ; v1@825,1820 cw(c842.21,1820) 830.04,1832.17
  Bottom Layer w10: R45.2@213.2,662.7 ccw(c172.63,703.27) 230,703.27 ; R45.2@220.27,655.63 ccw(c196.77,679.13) 230,679.13 ; R45.2@222.19,653.71 230,661.52 230,985 230,1045 230,1175 815,1760 v1(815,1820) ; v1@807.93,1812.93 cw(c790.86,1795.86) 815,1795.86 cw(c839.14,1795.86) v1@822.07,1812.93
  Bottom Layer w20: R37.2@162.19,653.71 R45.2@222.19,653.71 ; R37.2@167.64,648.26 cw(c180.82,635.08) 180.82,653.71 cw(c180.82,672.34) R37.2@167.64,659.17 ; R45.2@216.73,648.26 ccw(c203.56,635.08) 203.56,653.71 ccw(c203.56,672.34) R45.2@216.73,659.17
ADC_A1: C36.2 R88.2 R94.1 U1.15 | length 1642.7
  Top Layer w10: v1@837.93,1792.07 ccw(c820.86,1809.14) 845,1809.14 ccw(c869.14,1809.14) v1@852.07,1792.07 ; v1(845,1785) 845,1819.29 U1.15@974.6,1948.89
  Top Layer w20: R94.1@271.76,1004.26 cw(c258.59,991.09) 277.22,991.09 cw(c295.85,991.09) R94.1@282.68,1004.26 ; v1(277.22,977.22) R94.1@277.22,1009.72 ; R94.1@280,1005 C36.2@333.98,1005 ; R94.1@282.68,1015.18 ccw(c307.24,1039.74) 307.24,1005 ; 304.45,1005 ccw(c304.45,1036.76) C36.2@326.9,1014.3 ; R88.2@326.76,934.17 ccw(c313.59,947.34) 332.22,947.34 ccw(c350.85,947.34) R88.2@337.68,934.17 ; C36.2@326.9,1003.39 cw(c314.07,990.56) 332.22,990.56 ; R88.2@332.22,928.71 332.22,1008.7 C36.2@332.36,1008.85 ; 332.22,989.88 cw(c351.33,989.88) C36.2@337.82,1003.39
  Bottom Layer w10: 250,1140 250,1125 ; v1(277.22,977.22) 250,1004.44 250,1125 ; v1(845,1785) 845,1765 250,1170 250,1125
ADC_B0: R38.2 R46.2 U1.27 | length 2002.8
  Top Layer w10: v1(595,1250) 610,1235 v1(843.98,1235) ; v1@836.91,1227.93 ccw(c819.84,1210.86) 819.84,1235 ccw(c819.84,1259.14) v1@836.91,1242.07 ; 986.65,1651.65 ccw(c1003.76,1634.55) v1(980,1630) 980,1645 1000,1665 ; v1@989.82,1631.88 cw(c1026.16,1638.84) 1000,1665 ; U1.27@1141.64,1781.86 1024.78,1665 1000,1665
  Bottom Layer w10: v1(595,1250) 615,1250 980,1615 v1(980,1630) ; R46.2@834.99,664.98 ccw(c813.28,686.69) 843.98,686.69 ccw(c874.68,686.69) R46.2@852.98,664.98 ; v1@836.91,1227.93 cw(c819.84,1210.86) 843.98,1210.86 cw(c868.13,1210.86) v1@851.06,1227.93 ; R46.2@843.98,655.99 v1(843.98,1235) ; 952.32,1587.32 ccw(c909.64,1630) v1@970,1630 ; 969.39,1604.39 ccw(c943.79,1630) v1(980,1630) ; v1@980,1620 v1(980,1630)
  Bottom Layer w20: R38.2@787.98,655.99 R46.2@843.98,655.99 ; R38.2@793.44,650.54 cw(c806.61,637.36) 806.61,655.99 cw(c806.61,674.62) R38.2@793.44,661.45 ; R46.2@838.53,650.54 ccw(c825.35,637.36) 825.35,655.99 ccw(c825.35,674.62) R46.2@838.53,661.45
ADC_B1: C37.2 R90.2 R95.1 U1.26 | length 2072.7
  Top Layer w10: v1@610,1275 cw(c610,1250.86) 627.07,1267.93 cw(c644.14,1285) v1@620,1285 ; v1(610,1285) 640,1255 800,1255 810,1265 920,1265 v1(970,1215) ; 947.07,1642.07 ccw(c964.14,1625) v1(940,1625) 940,1635 990,1685 1016.94,1685 U1.26@1127.72,1795.78 ; v1@950,1625 cw(c998.28,1625) 964.14,1659.14 ; v1@960,1215 ccw(c935.86,1215) 952.93,1232.07 ccw(c970,1249.14) v1@970,1225 ; R95.1@968.02,1009 C37.2@1023.28,1009 ; R95.1@977.01,1000.01 cw(c998.72,978.3) 998.72,1009 cw(c998.72,1039.7) R95.1@977.01,1017.99 ; 991.34,1009 cw(c991.34,975.31) C37.2@1015.17,999.13 ; 995.57,1009 ccw(c995.57,1036.71) C37.2@1015.17,1017.12 ; C37.2@1023.74,1005.44 cw(c1019.92,980.65) v1@1045,980.65 ; C37.2@1024.16,1008.12 v1@1045,987.28 ; C37.2@1024.53,995.41 cw(c1025.34,967.62) v1@1045,987.28 ; C37.2@1036.32,995.97 cw(c1015.35,975) v1(1045,975) v1@1045,987.28 ; C37.2@1036.87,1007.75 ccw(c1064.66,1006.94) v1@1045,987.28
  Top Layer w20: R90.2@962.56,937.45 ccw(c947.27,952.73) 968.89,952.73 ; R95.1@962.56,1003.54 cw(c947.27,988.26) 968.89,988.26 ; R95.1@968.02,1009 968.89,1008.12 R90.2@968.89,932.87
  Bottom Layer w10: v1@610,1295 ccw(c610,1355.36) 652.68,1312.68 ; 635.61,1295.61 cw(c610,1321.21) v1(610,1285) 625,1285 940,1600 v1(940,1625) ; v1@970,1205 cw(c970,1180.86) 987.07,1197.93 cw(c1004.14,1215) v1@980,1215 ; v1(970,1215) 1015,1170 1015,1085 1025,1075 1025,1010 1035,1000 1035,985 v1(1045,975)
ADC_C0: R39.2 R47.2 U1.41 | length 1213.8
  Top Layer w10: U1.41@1461.78,1712.26 1505,1669.05 1505,1545 1495.98,1535.98 1495.98,1430.98 v1(1480,1415)
  Bottom Layer w10: R39.2@1430.99,844.98 ccw(c1399.74,876.24) 1443.94,876.24 ; 1443.94,857.15 ccw(c1461.14,857.15) 1448.98,844.98 ccw(c1470.68,866.69) 1470.68,835.99 ccw(c1470.68,805.29) R39.2@1448.98,827 ; 1481.72,1393.28 cw(c1493.58,1405.15) v1(1480,1415) 1480,1395 1500,1375 1500,1290 1515,1275 1515,1225 1430,1140 1430,1054.98 1439.98,1045 1439.98,945 1443.94,941.05 1443.94,839.94 R39.2@1439.98,835.99 R47.2@1495.98,835.99 R47.2@1495,836.98 ; R47.2@1486.99,827 ccw(c1465.28,805.29) 1465.28,835.99 ccw(c1465.28,866.69) R47.2@1486.99,844.98 ; v1@1488.09,1409.13 ccw(c1503.18,1398.18) 1490,1385
ADC_C1: C38.2 R92.2 R96.1 U1.29 | length 1894.5
  Top Layer w10: v1@1080,1640 cw(c1139.26,1640) 1097.36,1681.9 ; 1080.29,1664.83 ccw(c1105.12,1640) v1(1070,1640) 1070,1654.55 U1.29@1169.48,1754.02 ; v1@1095,1455 cw(c1095,1430.86) 1112.07,1447.93 cw(c1129.14,1465) v1@1105,1465 ; v1(1095,1465) 1135,1425 v1(1225,1425) ; v1@1217.93,1417.93 ccw(c1200.86,1400.86) 1200.86,1425 ccw(c1200.86,1449.14) v1@1217.93,1432.07
  Top Layer w20: v1(1410,1005) 1413.12,1008.12 C38.2@1452.16,1008.12 1507.14,1008.12 R96.1@1508.02,1009 R92.2@1508.02,931.99 ; v1@1413.54,1001.46 cw(c1429.62,985.38) 1429.62,1008.13 ; C38.2@1446.7,1002.67 ccw(c1433.53,989.5) 1433.53,1008.12 ccw(c1433.53,1026.75) C38.2@1446.7,1013.58 ; C38.2@1457.61,1002.67 cw(c1470.79,989.5) 1470.79,1008.12 cw(c1470.79,1026.75) C38.2@1457.61,1013.58 ; 1487.27,1008.12 ccw(c1487.27,1029.74) R96.1@1502.56,1014.46 ; R92.2@1502.56,937.45 ccw(c1489.39,950.62) 1508.02,950.62 ccw(c1526.65,950.62) R92.2@1513.47,937.45 ; R96.1@1502.56,1003.54 cw(c1489.39,990.37) 1508.02,990.37 cw(c1526.65,990.37) R96.1@1513.47,1003.54
  Bottom Layer w10: v1(1070,1640) 1100,1640 1145,1595 1145,1505 1105,1465 v1(1095,1465) ccw(c1095,1489.14) 1112.07,1472.07 ; v1@1077.07,1632.93 cw(c1094.14,1615.86) 1094.14,1640 cw(c1094.14,1664.14) v1@1077.07,1647.07 ; v1@1095,1475 ccw(c1095,1523.28) 1129.14,1489.14 ; v1@1215,1420 1220,1425 v1(1225,1425) 1420,1425 1480,1365 1480,1285 1495,1270 1495,1230 1410,1145 v1(1410,1005) ; v1@1232.07,1417.93 cw(c1249.14,1400.86) 1249.14,1425 cw(c1249.14,1449.14) v1@1232.07,1432.07 ; v1@1402.93,1012.07 ccw(c1385.86,1029.14) 1410,1029.14 ccw(c1434.14,1029.14) v1@1417.07,1012.07
ADC_D0: R40.2 R48.2 U1.43 | length 1784.2
  Top Layer w10: U1.43@1489.62,1740.1 1545,1684.73 1545,1460 1555,1450 v1(1555,1390) ; v1@1547.93,1397.07 ccw(c1530.86,1414.14) 1555,1414.14 ccw(c1579.14,1414.14) v1@1562.07,1397.07 ; v1@1575,1275 1620,1275 1660,1235 1750,1235 1770,1255 v1(1925,1255) ; v1@1582.07,1287.07 ccw(c1611.21,1316.21) 1611.21,1275 ; v1@1917.93,1247.93 ccw(c1900.86,1230.86) 1900.86,1255 ccw(c1900.86,1279.14) v1@1917.93,1262.07
  Bottom Layer w10: 1545,1341.72 cw(c1603.28,1341.72) v1@1562.07,1382.93 ; 1545,1365.86 cw(c1579.14,1365.86) v1(1555,1390) 1545,1380 1545,1310 v1(1575,1280) ; v1@1565,1280 ccw(c1540.86,1280) 1557.93,1297.07 ccw(c1575,1314.14) v1@1575,1290 ; v1(1925,1255) 1940,1240 1940,1135 1950,1125 1950,1015 1940,1005 1940,940 1985,895 ; R48.2@1963.33,845.31 ccw(c1917.2,895) 1985,895 ; R48.2@1970.14,837.98 ccw(c1938.49,872.07) 1985,872.07 ; R48.2@1971.98,835.99 1973.94,837.94 1985,849.01 1985,895 ; R48.2@1976.94,830.65 ccw(c1959.78,849.14) R48.2@1985,849.14
  Bottom Layer w20: R40.2@1915.98,835.99 R48.2@1971.98,835.99 ; R40.2@1921.44,830.54 cw(c1934.61,817.36) 1934.61,835.99 cw(c1934.61,854.62) R40.2@1921.44,841.45 ; R48.2@1966.53,830.54 ccw(c1953.35,817.36) 1953.35,835.99 ccw(c1953.35,854.62) R48.2@1966.53,841.45
ADC_D1: C35.2 R86.2 R93.1 U1.42 | length 1716.6
  Top Layer w10: U1.42@1475.7,1726.18 1525,1676.89 v1@1525,1415 ; v1@1517.93,1427.07 ccw(c1500.86,1444.14) 1525,1444.14 ccw(c1549.14,1444.14) v1@1532.07,1427.07 ; v1(1545,1250) 1550,1245 1620,1245 1650,1215 1760,1215 1780,1235 1905,1235 1920,1220 v1(1995,1220) ; v1@1552.07,1257.07 ccw(c1581.21,1286.21) 1581.21,1245 ; v1@1987.93,1212.93 ccw(c1970.86,1195.86) 1970.86,1220 ccw(c1970.86,1244.14) v1@1987.93,1227.07
  Top Layer w20: R93.1@2000.02,999 2024.02,975 ; R93.1@2000.02,1009 2000.89,1008.12 C35.2@2056.16,1008.12 ; v1(2005,975) 2024.02,975 ; R93.1@2005.47,1014.46 ccw(c2020.76,1029.74) 2020.76,1008.12 ; R93.1@2007.73,1008.72 ccw(c2046.33,1007.31) v1@2019.01,980 ; R86.2@2026.56,937.45 ccw(c2013.39,950.62) 2032.02,950.62 ccw(c2050.65,950.62) R86.2@2037.47,937.45 ; R86.2@2032.02,931.99 2032.02,967 2024.02,975 ; C35.2@2050.7,1002.67 ccw(c2037.53,989.5) 2037.53,1008.12 ccw(c2037.53,1026.75) C35.2@2050.7,1013.58
  Bottom Layer w10: 1520,1383.79 cw(c1561.21,1383.79) v1@1532.07,1412.93 ; v1@1525,1415 1520,1410 1520,1300 1545,1275 v1(1545,1250) ; v1@1537.93,1257.07 ccw(c1520.86,1274.14) 1545,1274.14 ccw(c1569.14,1274.14) v1@1552.07,1257.07 ; v1@1987.93,1212.93 cw(c1970.86,1195.86) 1995,1195.86 cw(c2019.14,1195.86) v1@2002.07,1212.93 ; v1(1995,1220) 1995,1005 2000,1000 2000,980 v1(2005,975)
  other v1: 1525,1420
ADCMA: C43.2 R101.1 U1.44 | length 2841.3
  Top Layer w10: v1@1195,2185 cw(c1195,2160.86) 1212.07,2177.93 cw(c1229.14,2195) v1@1205,2195 ; v1(1195,2195) 1230,2160 1230,2130 1420,1940 1420,1837.56 U1.44@1503.54,1754.02
  Bottom Layer w10: C43.2@427.88,3735.84 599.16,3735.84 725,3610 750,3610 760,3600 820,3600 840,3580 840,2990 805,2955 805,2705 815,2695 815,2580 1195,2200 v1(1195,2195) ; C43.2@436.87,3726.85 cw(c458.58,3705.14) 458.58,3735.84 cw(c458.58,3766.54) C43.2@436.87,3744.83 ; 1174.39,2220.61 cw(c1148.79,2195) v1@1185,2195 ; 1186.46,2208.54 ccw(c1195,2217.07) v1@1195,2205
  Bottom Layer w20: R101.1@421.54,3794.53 cw(c408.37,3781.35) 427,3781.35 cw(c445.63,3781.35) R101.1@432.46,3794.53 ; 427,3756.58 ccw(c448.62,3756.58) C43.2@433.33,3741.3 ; R101.1@427,3799.98 427,3736.72 C43.2@427.88,3735.84
ADCMB: C44.2 R103.1 U1.45 | length 2573.4
  Top Layer w10: v1@1252.93,2187.93 cw(c1235.86,2170.86) 1260,2170.86 cw(c1284.14,2170.86) v1@1267.07,2187.93 ; v1(1260,2195) 1260,2125 1440,1945 1440,1845.4 U1.45@1517.46,1767.94
  Bottom Layer w10: C44.2@923.16,3739.84 cw(c892.46,3739.84) 914.17,3718.13 cw(c935.88,3696.43) C44.2@935.88,3727.13 ; C44.2@935.88,3739.84 880,3683.97 880,3630 900,3610 900,3080 950,3030 950,2965 885,2900 885,2750 930,2705 930,2570 965,2535 965,2465 1225,2205 ; 1242.5,2205 cw(c1242.5,2184.69) v1(1260,2195) 1250,2205 1225,2205 ; v1@1251.38,2189.92 ccw(c1225,2174.38) 1225,2205
  Bottom Layer w20: R103.1@929.54,3794.53 cw(c916.37,3781.35) 935,3781.35 cw(c953.63,3781.35) R103.1@940.46,3794.53 ; 935,3760.58 ccw(c956.62,3760.58) C44.2@941.33,3745.3 ; R103.1@935,3799.98 935,3740.72 C44.2@935.88,3739.84
ADCMC: C51.2 R119.1 U1.46 | length 2588.8
  Top Layer w10: v1@1272.93,2277.93 cw(c1231.72,2236.72) 1290,2236.72 ; 1290,2260.86 ccw(c1255.86,2260.86) v1(1280,2285) 1290,2275 1290,2120 1460,1950 1460,1853.24 U1.46@1531.38,1781.86
  Bottom Layer w10: v1@1272.93,2277.93 ccw(c1255.86,2260.86) 1255.86,2285 ccw(c1255.86,2309.14) v1@1272.93,2292.07 ; v1@1290,2285 v1(1280,2285) 1235,2285 1070,2450 1070,2640 1045,2665 1045,2705 1045,2745 1080,2780 1080,3140 1175,3235 1175,3440 1335,3600 1335,3645 1355.88,3665.88 C51.2@1355.88,3735.84 ; C51.2@1346.88,3726.85 cw(c1325.17,3705.14) 1355.88,3705.14 cw(c1386.58,3705.14) C51.2@1364.87,3726.85
  Bottom Layer w20: R119.1@1349.54,3794.53 cw(c1336.37,3781.35) 1355,3781.35 cw(c1373.63,3781.35) R119.1@1360.46,3794.53 ; C51.2@1355,3736.72 R119.1@1355,3799.98 ; 1355,3756.58 ccw(c1376.62,3756.58) C51.2@1361.33,3741.3
ADCMD: C52.2 R121.1 U1.47 | length 2982.2
  Top Layer w10: v1(1330,2285) 1330,2260 1310,2240 1310,2125 1480,1955 1480,1861.08 U1.47@1545.3,1795.78 ; v1(1365,3630) v1(1585,3630) ; v1@1372.07,3622.93 cw(c1389.14,3605.86) 1389.14,3630 cw(c1389.14,3654.14) v1@1372.07,3637.07 ; v1@1577.93,3622.93 ccw(c1560.86,3605.86) 1560.86,3630 ccw(c1560.86,3654.14) v1@1577.93,3637.07
  Bottom Layer w10: 1070,2745 1075,2750 ; 1319.49,2310.51 cw(c1294.1,2285.13) v1(1330,2285) 1330,2300 1310,2320 1230,2320 1090,2460 1090,2605 1090,2645 1065,2670 1065,2740 1075,2750 ; v1@1357.93,3622.93 cw(c1340.86,3605.86) 1365,3605.86 cw(c1389.14,3605.86) v1@1372.07,3622.93 ; v1(1365,3630) 1365,3600 1195,3430 1195,3225 1100,3130 1100,2775 1075,2750 ; v1(1585,3630) 1655,3630 1735.88,3710.88 ; v1@1592.07,3622.93 cw(c1609.14,3605.86) 1609.14,3630 cw(c1609.14,3654.14) v1@1592.07,3637.07 ; C52.2@1728.4,3725.56 cw(c1717.72,3710.88) 1735.88,3710.88 ; C52.2@1735.88,3735.84 1735.88,3710.88 ; C52.2@1743.35,3725.56 ccw(c1754.03,3710.88) 1735.88,3710.88
  Bottom Layer w20: R121.1@1729.54,3794.53 cw(c1714.26,3779.24) 1735.87,3779.24 ; C52.2@1730.42,3741.3 ccw(c1717.25,3754.47) 1735.87,3754.47 ccw(c1754.5,3754.47) C52.2@1741.33,3741.3 ; R121.1@1735,3799.98 1735.88,3799.11 C52.2@1735.88,3735.84
AVDD: C72.2 C79.2 C80.2 R164.1 U14.38 U14.43 U14.45 | length 1443.6
  Top Layer w20: v3@2147.93,3137.07 cw(c2179.14,3105.86) 2179.14,3150 ; v3(2155,3130) 2175,3150 2349.97,3150 C80.2@2372.13,3127.84 2372.13,2980.06 R164.1@2364,2971.94 ; v3@2162.07,3122.93 cw(c2227.43,3057.57) 2227.43,3150 ; 2300,3150 cw(c2300,3055.72) 2366.67,3122.39 cw(c2353.5,3109.21) 2372.12,3109.21 cw(c2390.75,3109.21) C80.2@2377.58,3122.39 ; 2348.29,3150 cw(c2348.29,3104.01) C80.2@2380.81,3136.53 ; C72.2@2353.31,3049.04 cw(c2307.88,3003.61) 2372.13,3003.61 ; C72.2@2353.31,3071.09 ccw(c2307.88,3116.52) C80.2@2372.13,3116.52 ; R164.1@2358.39,2982.54 ccw(c2325.24,3015.69) 2372.13,3015.69 ; C80.2@2364.41,3127.84 ccw(c2345.78,3127.84) 2358.95,3141.02 ccw(c2372.13,3154.19) C80.2@2372.13,3135.56 ; 2372.12,3000.6 ccw(c2397.67,3000.6) R164.1@2379.61,2982.54
  Bottom Layer w10: C79.2@2029.79,3155.18 ccw(c2023.51,3166.12) 2036.13,3166.12 ; C79.2@2029.99,3140.24 cw(c2044.98,3149.82) 2032.4,3162.4 ; C79.2@2031.36,3132.37 cw(c2023.96,3114.02) 2043.74,3114.02 ; C79.2@2038.41,3145.62 cw(c2055.72,3156.68) 2041.2,3171.2 ; C79.2@2042.46,3155.18 cw(c2048.74,3166.12) 2036.12,3166.12 ; U14.38@2043.74,3062.41 2043.74,3115 2043.74,3136.54 C79.2@2036.13,3144.16 2036.13,3166.12 ; C79.2@2046.84,3151 cw(c2066.46,3163.54) 2050,3180 ; U14.43@2142.17,3062.41 2142.17,3112.17 ; 2142.17,3154.24 ccw(c2162.56,3154.24) v3@2156.49,3134.77 ; v3@2159.46,3144.32 cw(c2166.79,3167.83) 2142.17,3167.83 ; U14.45@2181.54,3062.41 2181.54,3113.46 2175,3120 2150,3120 2142.17,3112.17 ; 2036.13,3166.12 2050,3180 ; 2050,3180 2130,3180 2142.17,3167.83 ; 2142.17,3112.17 2142.17,3167.83